# Altium PCB Monitor.PcbDoc
Units mil, origin at the board's own origin, x right, y up, seen from the top; angles counter-clockwise.
Board outline 5450.32 x 2733.06 mil, 2 copper layers (Top Layer, Bottom Layer); 12 components, 18 nets, 139 pads, 1 vias.
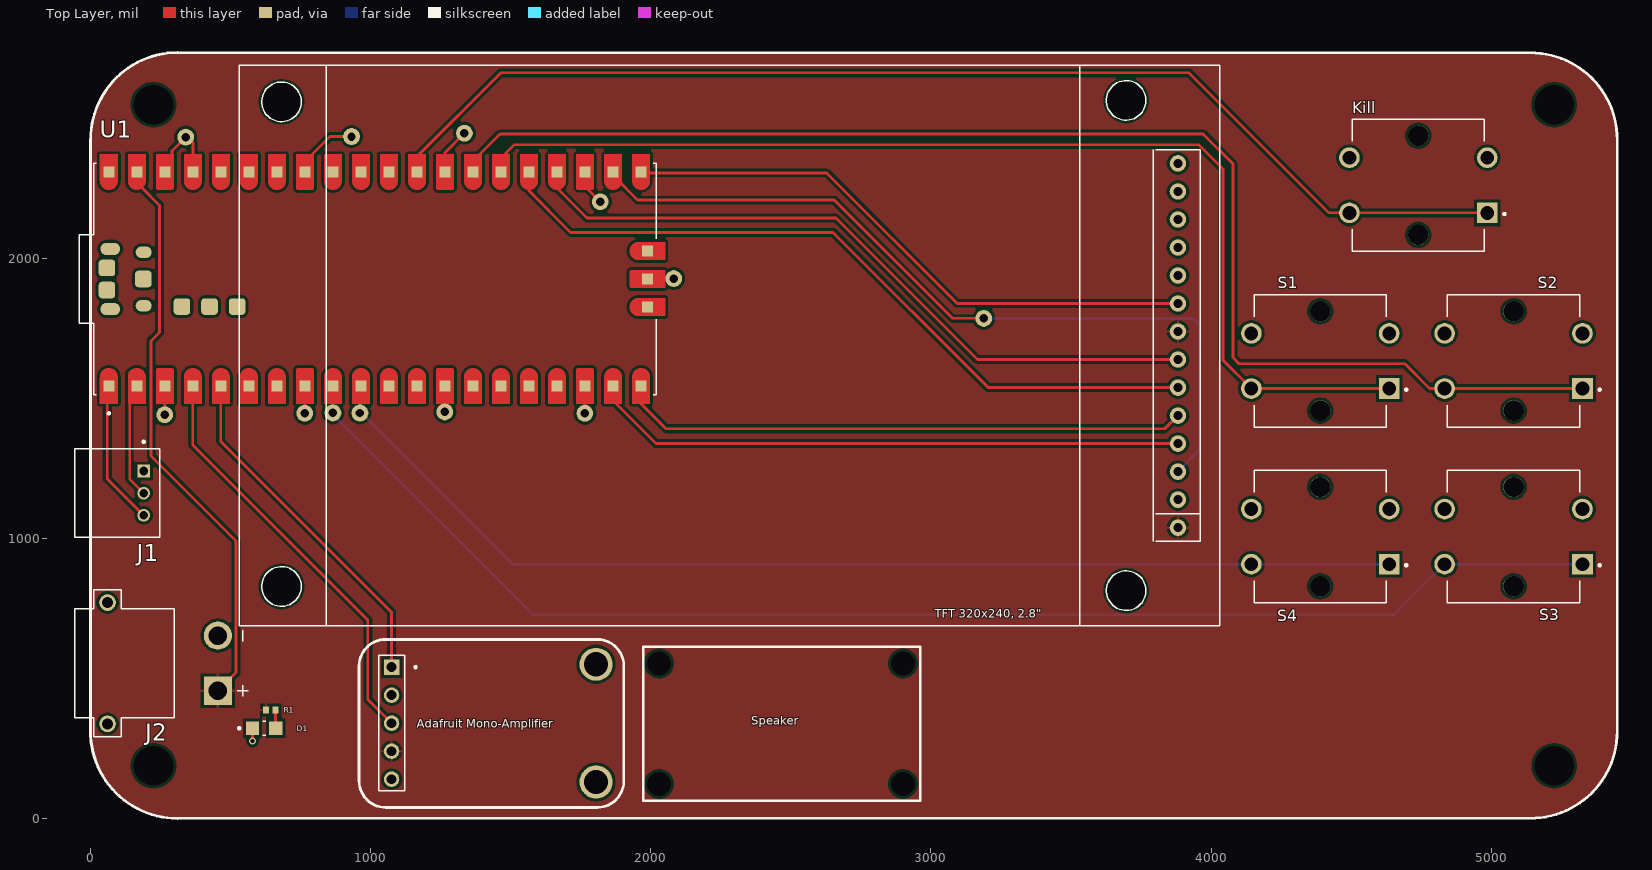
[diagram p0: Top Layer view]
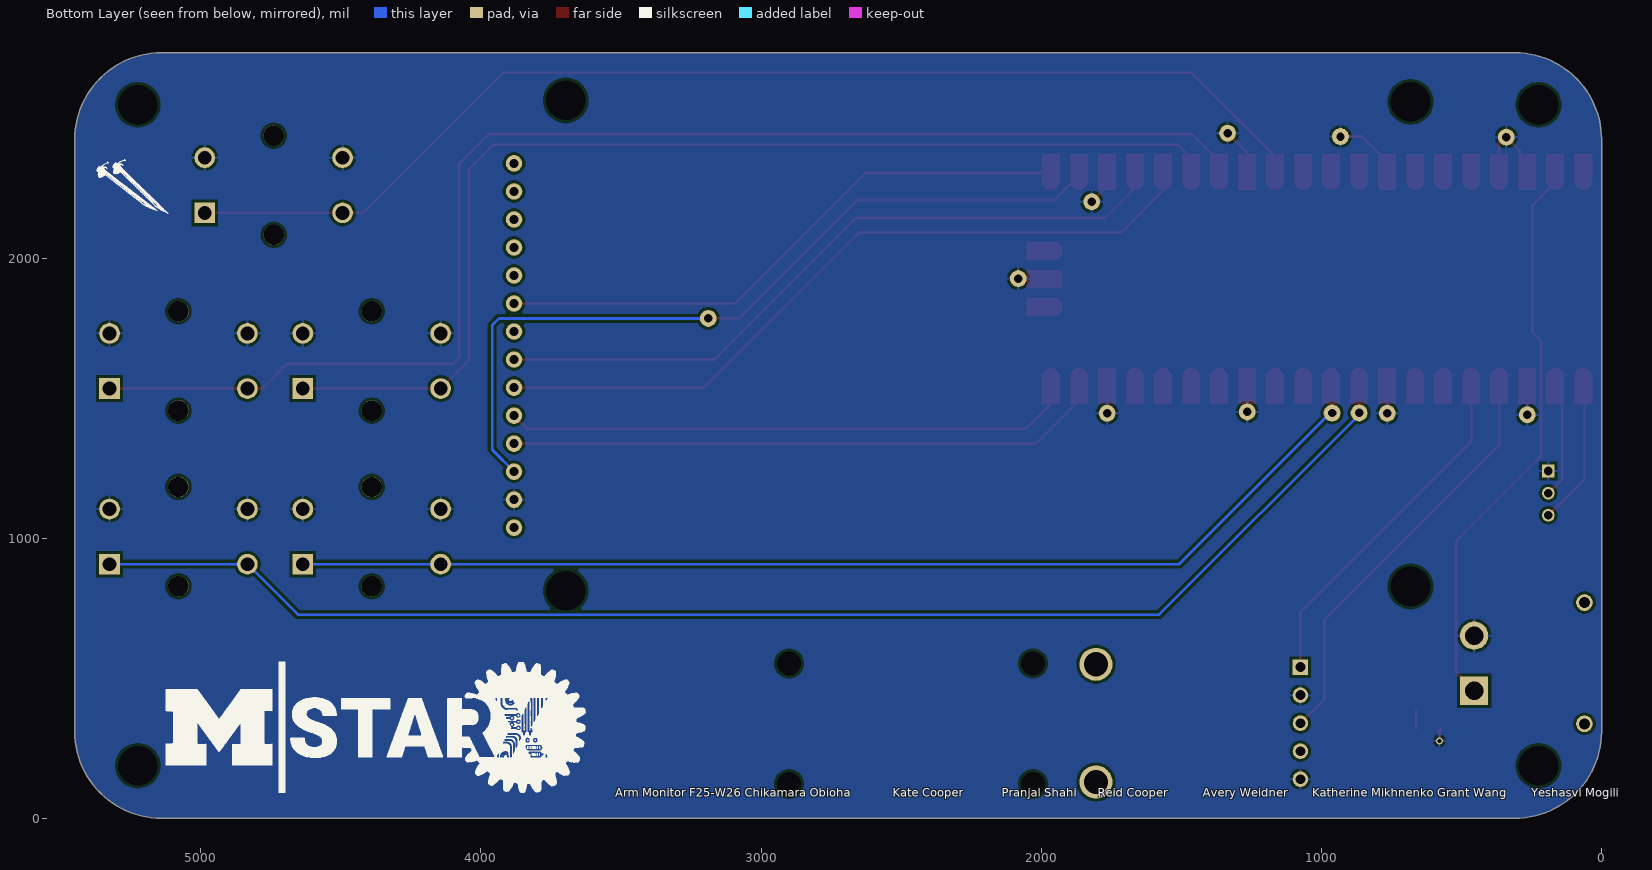
[diagram p1: Bottom Layer view, seen from below]

## Layer stack, top to bottom
Top Solder: solder mask 0.4, Solder Resist, Dk 3.5
Top Layer: signal copper 1.4
Dielectric 1: dielectric 12.6, FR-4, Dk 4.8
Bottom Layer: signal copper 1.4
Bottom Solder: solder mask 0.4, Solder Resist, Dk 3.5

## Board outline
0.16,312.26 0.16,2425 -0.16,2425 cw(c310,2425) 310,2735.16 5140,2735.16 cw(c5140,2425) 5450.16,2425 5450.16,308 5450.16,312.6 cw(c5140,312.6) 5140,2.44 5142,2.44 310.32,2.1 cw(c310.32,312.26)

## Design rules (kind name [scope] priority, off if disabled: settings)
Clearance [All] p1: gap=10 ignorepadtopadclearanceinfootprint=FALSE
PolygonConnect [All] p1: connectstyle=Relief reliefconductorwidth=10 reliefentries=4 polygonreliefangle="90 Angle" airgapwidth=10
RoutingVias [All] p1: holewidth=28 width=50 viastyle="Through Hole" minholewidth=28 minwidth=50 maxholewidth=28 maxwidth=50
SolderMaskExpansion [All] p1: expansion=4 istentingtop=FALSE
SupplyNets "Schematic Supply Nets_2" [InNet('3V3')] p1: voltage=0.000
SupplyNets "Schematic Supply Nets" [InNet('GND')] p2: voltage=0.000
Width [All] p1: maxlimit=10 minlimit=10 preferedwidth=10
30 further rules are at their usual default settings.

## Classes and differential pairs
component class Schematic: "Adafruit Mono-Amplifier" D1 J1 J2 Kill R1 S1 S2 S3 S4 U1

## Components (designator, comment, footprint, x,y, rotation, side; value= is the part's Value field where it differs from the comment)
* "TFT_320x240" TFT-320x240 3882,1690 r90 top
"Adafruit Mono-Amplifier" "5-146280-5" TE_5-146280-5 1075,342 r270 top (schematic designator J3)
D1 "LTST-C170GKT" LED_LTST-C170GKT 620,324 r0 top
J1 "440055-3" TE_440055-3 190,1242.02 r270 top
J2 "XT30PW-M" AMASS_XT30PW-M 61,556 r90 top
Kill "B3F-4055" SW_B3F-4055 4740,2262 r180 top (schematic designator S5)
R1 "150ohm" RESC1005X40N 644,389 r0 top
S1 "B3F-4055" SW_B3F-4055 4390,1635 r180 top
S2 "B3F-4055" SW_B3F-4055 5080,1635 r180 top
S3 "B3F-4055" SW_B3F-4055 5080,1008 r180 top
S4 "B3F-4055" SW_B3F-4055 4390,1008 r180 top
U1 "SC0915" MODULE_SC0915 1015.59,1927.53 r90 top

## Footprints (in the part's own frame and the unit in brackets; to place one, negate y for a bottom-side part, rotate by r counter-clockwise, add the part's x,y. Pads: shape width x height; smd on the part's side, far side on the other; paste and mask are expansions set on the pad)
AMASS_XT30PW-M [mm]
  round 2.55 hole 1.7: N(2.5,-10)
  rect 2.55x2.55 / inner round 2.55 / far side rect 2.55x2.55 hole 1.7: P(-2.5,-10)
  round 1.508 hole 1: S1(5.5,0) S2(-5.5,0)
  silkscreen extent -6.65,-12.75 6.65,2.95, body extent -6.65,-11 6.65,2.95, height 5
LED_LTST-C170GKT [mm]
  rect 1.2x1.2 smd paste+0 mask+0.102: 1(-1.05,0) 2(1.05,0)
  silkscreen extent -2.35,-0.63 0.13,0.63
MODULE_SC0915 [mm]
  rect 1x1 smd paste-1 mask+0: 1(-9.69,24.13) 2(-9.69,21.59) 3(-9.69,19.05) 4(-9.69,16.51) 5(-9.69,13.97) 6(-9.69,11.43) 7(-9.69,8.89) 8(-9.69,6.35) 9(-9.69,3.81) 10(-9.69,1.27) 11(-9.69,-1.27) 12(-9.69,-3.81) 13(-9.69,-6.35) 14(-9.69,-8.89) 15(-9.69,-11.43) 16(-9.69,-13.97) 17(-9.69,-16.51) 18(-9.69,-19.05) 19(-9.69,-21.59) 20(-9.69,-24.13) 21(9.69,-24.13) 22(9.69,-21.59) 23(9.69,-19.05) 24(9.69,-16.51) 25(9.69,-13.97) 26(9.69,-11.43) 27(9.69,-8.89) 28(9.69,-6.35) 29(9.69,-3.81) 30(9.69,-1.27) 31(9.69,1.27) 32(9.69,3.81) 33(9.69,6.35) 34(9.69,8.89) 35(9.69,11.43) 36(9.69,13.97) 37(9.69,16.51) 38(9.69,19.05) 39(9.69,21.59) 40(9.69,24.13) D1(-2.54,-24.7) D2(0,-24.7) D3(2.54,-24.7)
  oval 1.1x1.8 smd: A(-2.725,24) B(2.725,24)
  oval 1.05x1.45 smd: C(-2.425,20.97) D(2.425,20.97)
  rrect40% 1.5x1.5 smd: TP1(0,21) TP2(1,24.3) TP3(-1,24.3) TP4(-2.5,17.5) TP5(-2.5,15) TP6(-2.5,12.5)
  Top Layer region: -8.848,24.929 -8.806,24.926 -8.765,24.92 -8.724,24.913 -8.683,24.903 -8.643,24.891 -8.603,24.877 -8.565,24.861 -8.527,24.843 -8.49,24.823 -8.454,24.801 -8.42,24.777 -8.387,24.752 -8.355,24.725 -8.324,24.696 -8.295,24.665 -8.268,24.633 -8.243,24.6 -8.219,24.566 -8.197,24.53 -8.177,24.493 -8.159,24.455 -8.143,24.417 -8.129,24.377 -8.117,24.337 -8.107,24.296 -8.1,24.255 -8.094,24.214 -8.091,24.172 -8.09,24.13 -8.091,24.088 -8.094,24.046 -8.1,24.005 -8.107,23.964 -8.117,23.923 -8.129,23.883 -8.143,23.843 -8.159,23.805 -8.177,23.767 -8.197,23.73 -8.219,23.694 -8.243,23.66 -8.268,23.627 -8.295,23.595 -8.324,23.564 -8.355,23.535 -8.387,23.508 -8.42,23.483 -8.454,23.459 -8.49,23.437 -8.527,23.417 -8.565,23.399 -8.603,23.383 -8.643,23.369 -8.683,23.357 -8.724,23.347 -8.765,23.34 -8.806,23.334 -8.848,23.331 -8.89,23.33 -11.29,23.33 -11.29,24.93 -8.89,24.93
  Top Layer region: 2.582,-23.101 2.624,-23.104 2.665,-23.11 2.706,-23.117 2.747,-23.127 2.787,-23.139 2.827,-23.153 2.865,-23.169 2.903,-23.187 2.94,-23.207 2.976,-23.229 3.01,-23.253 3.043,-23.278 3.075,-23.305 3.106,-23.334 3.135,-23.365 3.162,-23.397 3.187,-23.43 3.211,-23.464 3.233,-23.5 3.253,-23.537 3.271,-23.575 3.287,-23.613 3.301,-23.653 3.313,-23.693 3.323,-23.734 3.33,-23.775 3.336,-23.816 3.339,-23.858 3.34,-23.9 3.34,-26.3 1.74,-26.3 1.74,-23.9 1.741,-23.858 1.744,-23.816 1.75,-23.775 1.757,-23.734 1.767,-23.693 1.779,-23.653 1.793,-23.613 1.809,-23.575 1.827,-23.537 1.847,-23.5 1.869,-23.464 1.893,-23.43 1.918,-23.397 1.945,-23.365 1.974,-23.334 2.005,-23.305 2.037,-23.278 2.07,-23.253 2.104,-23.229 2.14,-23.207 2.177,-23.187 2.215,-23.169 2.253,-23.153 2.293,-23.139 2.333,-23.127 2.374,-23.117 2.415,-23.11 2.456,-23.104 2.498,-23.101 2.54,-23.1
  Top Layer region: -2.498,-23.101 -2.456,-23.104 -2.415,-23.11 -2.374,-23.117 -2.333,-23.127 -2.293,-23.139 -2.253,-23.153 -2.215,-23.169 -2.177,-23.187 -2.14,-23.207 -2.104,-23.229 -2.07,-23.253 -2.037,-23.278 -2.005,-23.305 -1.974,-23.334 -1.945,-23.365 -1.918,-23.397 -1.893,-23.43 -1.869,-23.464 -1.847,-23.5 -1.827,-23.537 -1.809,-23.575 -1.793,-23.613 -1.779,-23.653 -1.767,-23.693 -1.757,-23.734 -1.75,-23.775 -1.744,-23.816 -1.741,-23.858 -1.74,-23.9 -1.74,-26.3 -3.34,-26.3 -3.34,-23.9 -3.339,-23.858 -3.336,-23.816 -3.33,-23.775 -3.323,-23.734 -3.313,-23.693 -3.301,-23.653 -3.287,-23.613 -3.271,-23.575 -3.253,-23.537 -3.233,-23.5 -3.211,-23.464 -3.187,-23.43 -3.162,-23.397 -3.135,-23.365 -3.106,-23.334 -3.075,-23.305 -3.043,-23.278 -3.01,-23.253 -2.976,-23.229 -2.94,-23.207 -2.903,-23.187 -2.865,-23.169 -2.827,-23.153 -2.787,-23.139 -2.747,-23.127 -2.706,-23.117 -2.665,-23.11 -2.624,-23.104 -2.582,-23.101 -2.54,-23.1
  Top Layer region: 11.29,-12.23 8.89,-12.23 8.848,-12.229 8.806,-12.226 8.765,-12.22 8.724,-12.213 8.683,-12.203 8.643,-12.191 8.603,-12.177 8.565,-12.161 8.527,-12.143 8.49,-12.123 8.454,-12.101 8.42,-12.077 8.387,-12.052 8.355,-12.025 8.324,-11.996 8.295,-11.965 8.268,-11.933 8.243,-11.9 8.219,-11.866 8.197,-11.83 8.177,-11.793 8.159,-11.755 8.143,-11.717 8.129,-11.677 8.117,-11.637 8.107,-11.596 8.1,-11.555 8.094,-11.514 8.091,-11.472 8.09,-11.43 8.091,-11.388 8.094,-11.346 8.1,-11.305 8.107,-11.264 8.117,-11.223 8.129,-11.183 8.143,-11.143 8.159,-11.105 8.177,-11.067 8.197,-11.03 8.219,-10.994 8.243,-10.96 8.268,-10.927 8.295,-10.895 8.324,-10.864 8.355,-10.835 8.387,-10.808 8.42,-10.783 8.454,-10.759 8.49,-10.737 8.527,-10.717 8.565,-10.699 8.603,-10.683 8.643,-10.669 8.683,-10.657 8.724,-10.647 8.765,-10.64 8.806,-10.634 8.848,-10.631 8.89,-10.63 11.29,-10.63
  Top Layer region: 11.29,-9.69 8.89,-9.69 8.848,-9.689 8.806,-9.686 8.765,-9.68 8.724,-9.673 8.683,-9.663 8.643,-9.651 8.603,-9.637 8.565,-9.621 8.527,-9.603 8.49,-9.583 8.454,-9.561 8.42,-9.537 8.387,-9.512 8.355,-9.485 8.324,-9.456 8.295,-9.425 8.268,-9.393 8.243,-9.36 8.219,-9.326 8.197,-9.29 8.177,-9.253 8.159,-9.215 8.143,-9.177 8.129,-9.137 8.117,-9.097 8.107,-9.056 8.1,-9.015 8.094,-8.974 8.091,-8.932 8.09,-8.89 8.091,-8.848 8.094,-8.806 8.1,-8.765 8.107,-8.724 8.117,-8.683 8.129,-8.643 8.143,-8.603 8.159,-8.565 8.177,-8.527 8.197,-8.49 8.219,-8.454 8.243,-8.42 8.268,-8.387 8.295,-8.355 8.324,-8.324 8.355,-8.295 8.387,-8.268 8.42,-8.243 8.454,-8.219 8.49,-8.197 8.527,-8.177 8.565,-8.159 8.603,-8.143 8.643,-8.129 8.683,-8.117 8.724,-8.107 8.765,-8.1 8.806,-8.094 8.848,-8.091 8.89,-8.09 11.29,-8.09
  Top Layer region: 11.29,0.47 8.89,0.47 8.848,0.471 8.806,0.474 8.765,0.48 8.724,0.487 8.683,0.497 8.643,0.509 8.603,0.523 8.565,0.539 8.527,0.557 8.49,0.577 8.454,0.599 8.42,0.623 8.387,0.648 8.355,0.675 8.324,0.704 8.295,0.735 8.268,0.767 8.243,0.8 8.219,0.834 8.197,0.87 8.177,0.907 8.159,0.945 8.143,0.983 8.129,1.023 8.117,1.063 8.107,1.104 8.1,1.145 8.094,1.186 8.091,1.228 8.09,1.27 8.091,1.312 8.094,1.354 8.1,1.395 8.107,1.436 8.117,1.477 8.129,1.517 8.143,1.557 8.159,1.595 8.177,1.633 8.197,1.67 8.219,1.706 8.243,1.74 8.268,1.773 8.295,1.805 8.324,1.836 8.355,1.865 8.387,1.892 8.42,1.917 8.454,1.941 8.49,1.963 8.527,1.983 8.565,2.001 8.603,2.017 8.643,2.031 8.683,2.043 8.724,2.053 8.765,2.06 8.806,2.066 8.848,2.069 8.89,2.07 11.29,2.07
  Top Layer region: 11.29,3.01 8.89,3.01 8.848,3.011 8.806,3.014 8.765,3.02 8.724,3.027 8.683,3.037 8.643,3.049 8.603,3.063 8.565,3.079 8.527,3.097 8.49,3.117 8.454,3.139 8.42,3.163 8.387,3.188 8.355,3.215 8.324,3.244 8.295,3.275 8.268,3.307 8.243,3.34 8.219,3.374 8.197,3.41 8.177,3.447 8.159,3.485 8.143,3.523 8.129,3.563 8.117,3.603 8.107,3.644 8.1,3.685 8.094,3.726 8.091,3.768 8.09,3.81 8.091,3.852 8.094,3.894 8.1,3.935 8.107,3.976 8.117,4.017 8.129,4.057 8.143,4.097 8.159,4.135 8.177,4.173 8.197,4.21 8.219,4.246 8.243,4.28 8.268,4.313 8.295,4.345 8.324,4.376 8.355,4.405 8.387,4.432 8.42,4.457 8.454,4.481 8.49,4.503 8.527,4.523 8.565,4.541 8.603,4.557 8.643,4.571 8.683,4.583 8.724,4.593 8.765,4.6 8.806,4.606 8.848,4.609 8.89,4.61 11.29,4.61
  Top Layer region: 11.29,8.09 8.89,8.09 8.848,8.091 8.806,8.094 8.765,8.1 8.724,8.107 8.683,8.117 8.643,8.129 8.603,8.143 8.565,8.159 8.527,8.177 8.49,8.197 8.454,8.219 8.42,8.243 8.387,8.268 8.355,8.295 8.324,8.324 8.295,8.355 8.268,8.387 8.243,8.42 8.219,8.454 8.197,8.49 8.177,8.527 8.159,8.565 8.143,8.603 8.129,8.643 8.117,8.683 8.107,8.724 8.1,8.765 8.094,8.806 8.091,8.848 8.09,8.89 8.091,8.932 8.094,8.974 8.1,9.015 8.107,9.056 8.117,9.097 8.129,9.137 8.143,9.177 8.159,9.215 8.177,9.253 8.197,9.29 8.219,9.326 8.243,9.36 8.268,9.393 8.295,9.425 8.324,9.456 8.355,9.485 8.387,9.512 8.42,9.537 8.454,9.561 8.49,9.583 8.527,9.603 8.565,9.621 8.603,9.637 8.643,9.651 8.683,9.663 8.724,9.673 8.765,9.68 8.806,9.686 8.848,9.689 8.89,9.69 11.29,9.69
  Top Layer region: 11.29,13.17 8.89,13.17 8.848,13.171 8.806,13.174 8.765,13.18 8.724,13.187 8.683,13.197 8.643,13.209 8.603,13.223 8.565,13.239 8.527,13.257 8.49,13.277 8.454,13.299 8.42,13.323 8.387,13.348 8.355,13.375 8.324,13.404 8.295,13.435 8.268,13.467 8.243,13.5 8.219,13.534 8.197,13.57 8.177,13.607 8.159,13.645 8.143,13.683 8.129,13.723 8.117,13.763 8.107,13.804 8.1,13.845 8.094,13.886 8.091,13.928 8.09,13.97 8.091,14.012 8.094,14.054 8.1,14.095 8.107,14.136 8.117,14.177 8.129,14.217 8.143,14.257 8.159,14.295 8.177,14.333 8.197,14.37 8.219,14.406 8.243,14.44 8.268,14.473 8.295,14.505 8.324,14.536 8.355,14.565 8.387,14.592 8.42,14.617 8.454,14.641 8.49,14.663 8.527,14.683 8.565,14.701 8.603,14.717 8.643,14.731 8.683,14.743 8.724,14.753 8.765,14.76 8.806,14.766 8.848,14.769 8.89,14.77 11.29,14.77
  Top Layer region: 11.29,23.33 8.89,23.33 8.848,23.331 8.806,23.334 8.765,23.34 8.724,23.347 8.683,23.357 8.643,23.369 8.603,23.383 8.565,23.399 8.527,23.417 8.49,23.437 8.454,23.459 8.42,23.483 8.387,23.508 8.355,23.535 8.324,23.564 8.295,23.595 8.268,23.627 8.243,23.66 8.219,23.694 8.197,23.73 8.177,23.767 8.159,23.805 8.143,23.843 8.129,23.883 8.117,23.923 8.107,23.964 8.1,24.005 8.094,24.046 8.091,24.088 8.09,24.13 8.091,24.172 8.094,24.214 8.1,24.255 8.107,24.296 8.117,24.337 8.129,24.377 8.143,24.417 8.159,24.455 8.177,24.493 8.197,24.53 8.219,24.566 8.243,24.6 8.268,24.633 8.295,24.665 8.324,24.696 8.355,24.725 8.387,24.752 8.42,24.777 8.454,24.801 8.49,24.823 8.527,24.843 8.565,24.861 8.603,24.877 8.643,24.891 8.683,24.903 8.724,24.913 8.765,24.92 8.806,24.926 8.848,24.929 8.89,24.93 11.29,24.93
  Top Layer region: 11.29,-4.61 8.89,-4.61 8.848,-4.609 8.806,-4.606 8.765,-4.6 8.724,-4.593 8.683,-4.583 8.643,-4.571 8.603,-4.557 8.565,-4.541 8.527,-4.523 8.49,-4.503 8.454,-4.481 8.42,-4.457 8.387,-4.432 8.355,-4.405 8.324,-4.376 8.295,-4.345 8.268,-4.313 8.243,-4.28 8.219,-4.246 8.197,-4.21 8.177,-4.173 8.159,-4.135 8.143,-4.097 8.129,-4.057 8.117,-4.017 8.107,-3.976 8.1,-3.935 8.094,-3.894 8.091,-3.852 8.09,-3.81 8.091,-3.768 8.094,-3.726 8.1,-3.685 8.107,-3.644 8.117,-3.603 8.129,-3.563 8.143,-3.523 8.159,-3.485 8.177,-3.447 8.197,-3.41 8.219,-3.374 8.243,-3.34 8.268,-3.307 8.295,-3.275 8.324,-3.244 8.355,-3.215 8.387,-3.188 8.42,-3.163 8.454,-3.139 8.49,-3.117 8.527,-3.097 8.565,-3.079 8.603,-3.063 8.643,-3.049 8.683,-3.037 8.724,-3.027 8.765,-3.02 8.806,-3.014 8.848,-3.011 8.89,-3.01 11.29,-3.01
  Top Layer region: 11.29,-2.07 8.89,-2.07 8.848,-2.069 8.806,-2.066 8.765,-2.06 8.724,-2.053 8.683,-2.043 8.643,-2.031 8.603,-2.017 8.565,-2.001 8.527,-1.983 8.49,-1.963 8.454,-1.941 8.42,-1.917 8.387,-1.892 8.355,-1.865 8.324,-1.836 8.295,-1.805 8.268,-1.773 8.243,-1.74 8.219,-1.706 8.197,-1.67 8.177,-1.633 8.159,-1.595 8.143,-1.557 8.129,-1.517 8.117,-1.477 8.107,-1.436 8.1,-1.395 8.094,-1.354 8.091,-1.312 8.09,-1.27 8.091,-1.228 8.094,-1.186 8.1,-1.145 8.107,-1.104 8.117,-1.063 8.129,-1.023 8.143,-0.983 8.159,-0.945 8.177,-0.907 8.197,-0.87 8.219,-0.834 8.243,-0.8 8.268,-0.767 8.295,-0.735 8.324,-0.704 8.355,-0.675 8.387,-0.648 8.42,-0.623 8.454,-0.599 8.49,-0.577 8.527,-0.557 8.565,-0.539 8.603,-0.523 8.643,-0.509 8.683,-0.497 8.724,-0.487 8.765,-0.48 8.806,-0.474 8.848,-0.471 8.89,-0.47 11.29,-0.47
  Top Layer region: 11.29,10.63 8.89,10.63 8.848,10.631 8.806,10.634 8.765,10.64 8.724,10.647 8.683,10.657 8.643,10.669 8.603,10.683 8.565,10.699 8.527,10.717 8.49,10.737 8.454,10.759 8.42,10.783 8.387,10.808 8.355,10.835 8.324,10.864 8.295,10.895 8.268,10.927 8.243,10.96 8.219,10.994 8.197,11.03 8.177,11.067 8.159,11.105 8.143,11.143 8.129,11.183 8.117,11.223 8.107,11.264 8.1,11.305 8.094,11.346 8.091,11.388 8.09,11.43 8.091,11.472 8.094,11.514 8.1,11.555 8.107,11.596 8.117,11.637 8.129,11.677 8.143,11.717 8.159,11.755 8.177,11.793 8.197,11.83 8.219,11.866 8.243,11.9 8.268,11.933 8.295,11.965 8.324,11.996 8.355,12.025 8.387,12.052 8.42,12.077 8.454,12.101 8.49,12.123 8.527,12.143 8.565,12.161 8.603,12.177 8.643,12.191 8.683,12.203 8.724,12.213 8.765,12.22 8.806,12.226 8.848,12.229 8.89,12.23 11.29,12.23
  Top Layer region: -8.848,9.689 -8.806,9.686 -8.765,9.68 -8.724,9.673 -8.683,9.663 -8.643,9.651 -8.603,9.637 -8.565,9.621 -8.527,9.603 -8.49,9.583 -8.454,9.561 -8.42,9.537 -8.387,9.512 -8.355,9.485 -8.324,9.456 -8.295,9.425 -8.268,9.393 -8.243,9.36 -8.219,9.326 -8.197,9.29 -8.177,9.253 -8.159,9.215 -8.143,9.177 -8.129,9.137 -8.117,9.097 -8.107,9.056 -8.1,9.015 -8.094,8.974 -8.091,8.932 -8.09,8.89 -8.091,8.848 -8.094,8.806 -8.1,8.765 -8.107,8.724 -8.117,8.683 -8.129,8.643 -8.143,8.603 -8.159,8.565 -8.177,8.527 -8.197,8.49 -8.219,8.454 -8.243,8.42 -8.268,8.387 -8.295,8.355 -8.324,8.324 -8.355,8.295 -8.387,8.268 -8.42,8.243 -8.454,8.219 -8.49,8.197 -8.527,8.177 -8.565,8.159 -8.603,8.143 -8.643,8.129 -8.683,8.117 -8.724,8.107 -8.765,8.1 -8.806,8.094 -8.848,8.091 -8.89,8.09 -11.29,8.09 -11.29,9.69 -8.89,9.69
  Top Layer region: -8.848,12.229 -8.806,12.226 -8.765,12.22 -8.724,12.213 -8.683,12.203 -8.643,12.191 -8.603,12.177 -8.565,12.161 -8.527,12.143 -8.49,12.123 -8.454,12.101 -8.42,12.077 -8.387,12.052 -8.355,12.025 -8.324,11.996 -8.295,11.965 -8.268,11.933 -8.243,11.9 -8.219,11.866 -8.197,11.83 -8.177,11.793 -8.159,11.755 -8.143,11.717 -8.129,11.677 -8.117,11.637 -8.107,11.596 -8.1,11.555 -8.094,11.514 -8.091,11.472 -8.09,11.43 -8.091,11.388 -8.094,11.346 -8.1,11.305 -8.107,11.264 -8.117,11.223 -8.129,11.183 -8.143,11.143 -8.159,11.105 -8.177,11.067 -8.197,11.03 -8.219,10.994 -8.243,10.96 -8.268,10.927 -8.295,10.895 -8.324,10.864 -8.355,10.835 -8.387,10.808 -8.42,10.783 -8.454,10.759 -8.49,10.737 -8.527,10.717 -8.565,10.699 -8.603,10.683 -8.643,10.669 -8.683,10.657 -8.724,10.647 -8.765,10.64 -8.806,10.634 -8.848,10.631 -8.89,10.63 -11.29,10.63 -11.29,12.23 -8.89,12.23
  Top Layer region: -8.848,14.769 -8.806,14.766 -8.765,14.76 -8.724,14.753 -8.683,14.743 -8.643,14.731 -8.603,14.717 -8.565,14.701 -8.527,14.683 -8.49,14.663 -8.454,14.641 -8.42,14.617 -8.387,14.592 -8.355,14.565 -8.324,14.536 -8.295,14.505 -8.268,14.473 -8.243,14.44 -8.219,14.406 -8.197,14.37 -8.177,14.333 -8.159,14.295 -8.143,14.257 -8.129,14.217 -8.117,14.177 -8.107,14.136 -8.1,14.095 -8.094,14.054 -8.091,14.012 -8.09,13.97 -8.091,13.928 -8.094,13.886 -8.1,13.845 -8.107,13.804 -8.117,13.763 -8.129,13.723 -8.143,13.683 -8.159,13.645 -8.177,13.607 -8.197,13.57 -8.219,13.534 -8.243,13.5 -8.268,13.467 -8.295,13.435 -8.324,13.404 -8.355,13.375 -8.387,13.348 -8.42,13.323 -8.454,13.299 -8.49,13.277 -8.527,13.257 -8.565,13.239 -8.603,13.223 -8.643,13.209 -8.683,13.197 -8.724,13.187 -8.765,13.18 -8.806,13.174 -8.848,13.171 -8.89,13.17 -11.29,13.17 -11.29,14.77 -8.89,14.77
  Top Layer region: -8.848,17.309 -8.806,17.306 -8.765,17.3 -8.724,17.293 -8.683,17.283 -8.643,17.271 -8.603,17.257 -8.565,17.241 -8.527,17.223 -8.49,17.203 -8.454,17.181 -8.42,17.157 -8.387,17.132 -8.355,17.105 -8.324,17.076 -8.295,17.045 -8.268,17.013 -8.243,16.98 -8.219,16.946 -8.197,16.91 -8.177,16.873 -8.159,16.835 -8.143,16.797 -8.129,16.757 -8.117,16.717 -8.107,16.676 -8.1,16.635 -8.094,16.594 -8.091,16.552 -8.09,16.51 -8.091,16.468 -8.094,16.426 -8.1,16.385 -8.107,16.344 -8.117,16.303 -8.129,16.263 -8.143,16.223 -8.159,16.185 -8.177,16.147 -8.197,16.11 -8.219,16.074 -8.243,16.04 -8.268,16.007 -8.295,15.975 -8.324,15.944 -8.355,15.915 -8.387,15.888 -8.42,15.863 -8.454,15.839 -8.49,15.817 -8.527,15.797 -8.565,15.779 -8.603,15.763 -8.643,15.749 -8.683,15.737 -8.724,15.727 -8.765,15.72 -8.806,15.714 -8.848,15.711 -8.89,15.71 -11.29,15.71 -11.29,17.31 -8.89,17.31
  Top Layer region: -8.848,22.389 -8.806,22.386 -8.765,22.38 -8.724,22.373 -8.683,22.363 -8.643,22.351 -8.603,22.337 -8.565,22.321 -8.527,22.303 -8.49,22.283 -8.454,22.261 -8.42,22.237 -8.387,22.212 -8.355,22.185 -8.324,22.156 -8.295,22.125 -8.268,22.093 -8.243,22.06 -8.219,22.026 -8.197,21.99 -8.177,21.953 -8.159,21.915 -8.143,21.877 -8.129,21.837 -8.117,21.797 -8.107,21.756 -8.1,21.715 -8.094,21.674 -8.091,21.632 -8.09,21.59 -8.091,21.548 -8.094,21.506 -8.1,21.465 -8.107,21.424 -8.117,21.383 -8.129,21.343 -8.143,21.303 -8.159,21.265 -8.177,21.227 -8.197,21.19 -8.219,21.154 -8.243,21.12 -8.268,21.087 -8.295,21.055 -8.324,21.024 -8.355,20.995 -8.387,20.968 -8.42,20.943 -8.454,20.919 -8.49,20.897 -8.527,20.877 -8.565,20.859 -8.603,20.843 -8.643,20.829 -8.683,20.817 -8.724,20.807 -8.765,20.8 -8.806,20.794 -8.848,20.791 -8.89,20.79 -11.29,20.79 -11.29,22.39 -8.89,22.39
  Top Layer region: -8.848,-15.711 -8.806,-15.714 -8.765,-15.72 -8.724,-15.727 -8.683,-15.737 -8.643,-15.749 -8.603,-15.763 -8.565,-15.779 -8.527,-15.797 -8.49,-15.817 -8.454,-15.839 -8.42,-15.863 -8.387,-15.888 -8.355,-15.915 -8.324,-15.944 -8.295,-15.975 -8.268,-16.007 -8.243,-16.04 -8.219,-16.074 -8.197,-16.11 -8.177,-16.147 -8.159,-16.185 -8.143,-16.223 -8.129,-16.263 -8.117,-16.303 -8.107,-16.344 -8.1,-16.385 -8.094,-16.426 -8.091,-16.468 -8.09,-16.51 -8.091,-16.552 -8.094,-16.594 -8.1,-16.635 -8.107,-16.676 -8.117,-16.717 -8.129,-16.757 -8.143,-16.797 -8.159,-16.835 -8.177,-16.873 -8.197,-16.91 -8.219,-16.946 -8.243,-16.98 -8.268,-17.013 -8.295,-17.045 -8.324,-17.076 -8.355,-17.105 -8.387,-17.132 -8.42,-17.157 -8.454,-17.181 -8.49,-17.203 -8.527,-17.223 -8.565,-17.241 -8.603,-17.257 -8.643,-17.271 -8.683,-17.283 -8.724,-17.293 -8.765,-17.3 -8.806,-17.306 -8.848,-17.309 -8.89,-17.31 -11.29,-17.31 -11.29,-15.71 -8.89,-15.71
  Top Layer region: -8.848,-13.171 -8.806,-13.174 -8.765,-13.18 -8.724,-13.187 -8.683,-13.197 -8.643,-13.209 -8.603,-13.223 -8.565,-13.239 -8.527,-13.257 -8.49,-13.277 -8.454,-13.299 -8.42,-13.323 -8.387,-13.348 -8.355,-13.375 -8.324,-13.404 -8.295,-13.435 -8.268,-13.467 -8.243,-13.5 -8.219,-13.534 -8.197,-13.57 -8.177,-13.607 -8.159,-13.645 -8.143,-13.683 -8.129,-13.723 -8.117,-13.763 -8.107,-13.804 -8.1,-13.845 -8.094,-13.886 -8.091,-13.928 -8.09,-13.97 -8.091,-14.012 -8.094,-14.054 -8.1,-14.095 -8.107,-14.136 -8.117,-14.177 -8.129,-14.217 -8.143,-14.257 -8.159,-14.295 -8.177,-14.333 -8.197,-14.37 -8.219,-14.406 -8.243,-14.44 -8.268,-14.473 -8.295,-14.505 -8.324,-14.536 -8.355,-14.565 -8.387,-14.592 -8.42,-14.617 -8.454,-14.641 -8.49,-14.663 -8.527,-14.683 -8.565,-14.701 -8.603,-14.717 -8.643,-14.731 -8.683,-14.743 -8.724,-14.753 -8.765,-14.76 -8.806,-14.766 -8.848,-14.769 -8.89,-14.77 -11.29,-14.77 -11.29,-13.17 -8.89,-13.17
  Top Layer region: -8.848,-10.631 -8.806,-10.634 -8.765,-10.64 -8.724,-10.647 -8.683,-10.657 -8.643,-10.669 -8.603,-10.683 -8.565,-10.699 -8.527,-10.717 -8.49,-10.737 -8.454,-10.759 -8.42,-10.783 -8.387,-10.808 -8.355,-10.835 -8.324,-10.864 -8.295,-10.895 -8.268,-10.927 -8.243,-10.96 -8.219,-10.994 -8.197,-11.03 -8.177,-11.067 -8.159,-11.105 -8.143,-11.143 -8.129,-11.183 -8.117,-11.223 -8.107,-11.264 -8.1,-11.305 -8.094,-11.346 -8.091,-11.388 -8.09,-11.43 -8.091,-11.472 -8.094,-11.514 -8.1,-11.555 -8.107,-11.596 -8.117,-11.637 -8.129,-11.677 -8.143,-11.717 -8.159,-11.755 -8.177,-11.793 -8.197,-11.83 -8.219,-11.866 -8.243,-11.9 -8.268,-11.933 -8.295,-11.965 -8.324,-11.996 -8.355,-12.025 -8.387,-12.052 -8.42,-12.077 -8.454,-12.101 -8.49,-12.123 -8.527,-12.143 -8.565,-12.161 -8.603,-12.177 -8.643,-12.191 -8.683,-12.203 -8.724,-12.213 -8.765,-12.22 -8.806,-12.226 -8.848,-12.229 -8.89,-12.23 -11.29,-12.23 -11.29,-10.63 -8.89,-10.63
  Top Layer region: -8.848,-8.091 -8.806,-8.094 -8.765,-8.1 -8.724,-8.107 -8.683,-8.117 -8.643,-8.129 -8.603,-8.143 -8.565,-8.159 -8.527,-8.177 -8.49,-8.197 -8.454,-8.219 -8.42,-8.243 -8.387,-8.268 -8.355,-8.295 -8.324,-8.324 -8.295,-8.355 -8.268,-8.387 -8.243,-8.42 -8.219,-8.454 -8.197,-8.49 -8.177,-8.527 -8.159,-8.565 -8.143,-8.603 -8.129,-8.643 -8.117,-8.683 -8.107,-8.724 -8.1,-8.765 -8.094,-8.806 -8.091,-8.848 -8.09,-8.89 -8.091,-8.932 -8.094,-8.974 -8.1,-9.015 -8.107,-9.056 -8.117,-9.097 -8.129,-9.137 -8.143,-9.177 -8.159,-9.215 -8.177,-9.253 -8.197,-9.29 -8.219,-9.326 -8.243,-9.36 -8.268,-9.393 -8.295,-9.425 -8.324,-9.456 -8.355,-9.485 -8.387,-9.512 -8.42,-9.537 -8.454,-9.561 -8.49,-9.583 -8.527,-9.603 -8.565,-9.621 -8.603,-9.637 -8.643,-9.651 -8.683,-9.663 -8.724,-9.673 -8.765,-9.68 -8.806,-9.686 -8.848,-9.689 -8.89,-9.69 -11.29,-9.69 -11.29,-8.09 -8.89,-8.09
  Top Layer region: -8.848,-3.011 -8.806,-3.014 -8.765,-3.02 -8.724,-3.027 -8.683,-3.037 -8.643,-3.049 -8.603,-3.063 -8.565,-3.079 -8.527,-3.097 -8.49,-3.117 -8.454,-3.139 -8.42,-3.163 -8.387,-3.188 -8.355,-3.215 -8.324,-3.244 -8.295,-3.275 -8.268,-3.307 -8.243,-3.34 -8.219,-3.374 -8.197,-3.41 -8.177,-3.447 -8.159,-3.485 -8.143,-3.523 -8.129,-3.563 -8.117,-3.603 -8.107,-3.644 -8.1,-3.685 -8.094,-3.726 -8.091,-3.768 -8.09,-3.81 -8.091,-3.852 -8.094,-3.894 -8.1,-3.935 -8.107,-3.976 -8.117,-4.017 -8.129,-4.057 -8.143,-4.097 -8.159,-4.135 -8.177,-4.173 -8.197,-4.21 -8.219,-4.246 -8.243,-4.28 -8.268,-4.313 -8.295,-4.345 -8.324,-4.376 -8.355,-4.405 -8.387,-4.432 -8.42,-4.457 -8.454,-4.481 -8.49,-4.503 -8.527,-4.523 -8.565,-4.541 -8.603,-4.557 -8.643,-4.571 -8.683,-4.583 -8.724,-4.593 -8.765,-4.6 -8.806,-4.606 -8.848,-4.609 -8.89,-4.61 -11.29,-4.61 -11.29,-3.01 -8.89,-3.01
  Top Layer region: -8.848,-0.471 -8.806,-0.474 -8.765,-0.48 -8.724,-0.487 -8.683,-0.497 -8.643,-0.509 -8.603,-0.523 -8.565,-0.539 -8.527,-0.557 -8.49,-0.577 -8.454,-0.599 -8.42,-0.623 -8.387,-0.648 -8.355,-0.675 -8.324,-0.704 -8.295,-0.735 -8.268,-0.767 -8.243,-0.8 -8.219,-0.834 -8.197,-0.87 -8.177,-0.907 -8.159,-0.945 -8.143,-0.983 -8.129,-1.023 -8.117,-1.063 -8.107,-1.104 -8.1,-1.145 -8.094,-1.186 -8.091,-1.228 -8.09,-1.27 -8.091,-1.312 -8.094,-1.354 -8.1,-1.395 -8.107,-1.436 -8.117,-1.477 -8.129,-1.517 -8.143,-1.557 -8.159,-1.595 -8.177,-1.633 -8.197,-1.67 -8.219,-1.706 -8.243,-1.74 -8.268,-1.773 -8.295,-1.805 -8.324,-1.836 -8.355,-1.865 -8.387,-1.892 -8.42,-1.917 -8.454,-1.941 -8.49,-1.963 -8.527,-1.983 -8.565,-2.001 -8.603,-2.017 -8.643,-2.031 -8.683,-2.043 -8.724,-2.053 -8.765,-2.06 -8.806,-2.066 -8.848,-2.069 -8.89,-2.07 -11.29,-2.07 -11.29,-0.47 -8.89,-0.47
  Top Layer region: -8.848,2.069 -8.806,2.066 -8.765,2.06 -8.724,2.053 -8.683,2.043 -8.643,2.031 -8.603,2.017 -8.565,2.001 -8.527,1.983 -8.49,1.963 -8.454,1.941 -8.42,1.917 -8.387,1.892 -8.355,1.865 -8.324,1.836 -8.295,1.805 -8.268,1.773 -8.243,1.74 -8.219,1.706 -8.197,1.67 -8.177,1.633 -8.159,1.595 -8.143,1.557 -8.129,1.517 -8.117,1.477 -8.107,1.436 -8.1,1.395 -8.094,1.354 -8.091,1.312 -8.09,1.27 -8.091,1.228 -8.094,1.186 -8.1,1.145 -8.107,1.104 -8.117,1.063 -8.129,1.023 -8.143,0.983 -8.159,0.945 -8.177,0.907 -8.197,0.87 -8.219,0.834 -8.243,0.8 -8.268,0.767 -8.295,0.735 -8.324,0.704 -8.355,0.675 -8.387,0.648 -8.42,0.623 -8.454,0.599 -8.49,0.577 -8.527,0.557 -8.565,0.539 -8.603,0.523 -8.643,0.509 -8.683,0.497 -8.724,0.487 -8.765,0.48 -8.806,0.474 -8.848,0.471 -8.89,0.47 -11.29,0.47 -11.29,2.07 -8.89,2.07
  Top Layer region: -8.848,4.609 -8.806,4.606 -8.765,4.6 -8.724,4.593 -8.683,4.583 -8.643,4.571 -8.603,4.557 -8.565,4.541 -8.527,4.523 -8.49,4.503 -8.454,4.481 -8.42,4.457 -8.387,4.432 -8.355,4.405 -8.324,4.376 -8.295,4.345 -8.268,4.313 -8.243,4.28 -8.219,4.246 -8.197,4.21 -8.177,4.173 -8.159,4.135 -8.143,4.097 -8.129,4.057 -8.117,4.017 -8.107,3.976 -8.1,3.935 -8.094,3.894 -8.091,3.852 -8.09,3.81 -8.091,3.768 -8.094,3.726 -8.1,3.685 -8.107,3.644 -8.117,3.603 -8.129,3.563 -8.143,3.523 -8.159,3.485 -8.177,3.447 -8.197,3.41 -8.219,3.374 -8.243,3.34 -8.268,3.307 -8.295,3.275 -8.324,3.244 -8.355,3.215 -8.387,3.188 -8.42,3.163 -8.454,3.139 -8.49,3.117 -8.527,3.097 -8.565,3.079 -8.603,3.063 -8.643,3.049 -8.683,3.037 -8.724,3.027 -8.765,3.02 -8.806,3.014 -8.848,3.011 -8.89,3.01 -11.29,3.01 -11.29,4.61 -8.89,4.61
  Top Layer region: -8.848,-20.791 -8.806,-20.794 -8.765,-20.8 -8.724,-20.807 -8.683,-20.817 -8.643,-20.829 -8.603,-20.843 -8.565,-20.859 -8.527,-20.877 -8.49,-20.897 -8.454,-20.919 -8.42,-20.943 -8.387,-20.968 -8.355,-20.995 -8.324,-21.024 -8.295,-21.055 -8.268,-21.087 -8.243,-21.12 -8.219,-21.154 -8.197,-21.19 -8.177,-21.227 -8.159,-21.265 -8.143,-21.303 -8.129,-21.343 -8.117,-21.383 -8.107,-21.424 -8.1,-21.465 -8.094,-21.506 -8.091,-21.548 -8.09,-21.59 -8.091,-21.632 -8.094,-21.674 -8.1,-21.715 -8.107,-21.756 -8.117,-21.797 -8.129,-21.837 -8.143,-21.877 -8.159,-21.915 -8.177,-21.953 -8.197,-21.99 -8.219,-22.026 -8.243,-22.06 -8.268,-22.093 -8.295,-22.125 -8.324,-22.156 -8.355,-22.185 -8.387,-22.212 -8.42,-22.237 -8.454,-22.261 -8.49,-22.283 -8.527,-22.303 -8.565,-22.321 -8.603,-22.337 -8.643,-22.351 -8.683,-22.363 -8.724,-22.373 -8.765,-22.38 -8.806,-22.386 -8.848,-22.389 -8.89,-22.39 -11.29,-22.39 -11.29,-20.79 -8.89,-20.79
  Top Layer region: 11.29,-17.31 8.89,-17.31 8.848,-17.309 8.806,-17.306 8.765,-17.3 8.724,-17.293 8.683,-17.283 8.643,-17.271 8.603,-17.257 8.565,-17.241 8.527,-17.223 8.49,-17.203 8.454,-17.181 8.42,-17.157 8.387,-17.132 8.355,-17.105 8.324,-17.076 8.295,-17.045 8.268,-17.013 8.243,-16.98 8.219,-16.946 8.197,-16.91 8.177,-16.873 8.159,-16.835 8.143,-16.797 8.129,-16.757 8.117,-16.717 8.107,-16.676 8.1,-16.635 8.094,-16.594 8.091,-16.552 8.09,-16.51 8.091,-16.468 8.094,-16.426 8.1,-16.385 8.107,-16.344 8.117,-16.303 8.129,-16.263 8.143,-16.223 8.159,-16.185 8.177,-16.147 8.197,-16.11 8.219,-16.074 8.243,-16.04 8.268,-16.007 8.295,-15.975 8.324,-15.944 8.355,-15.915 8.387,-15.888 8.42,-15.863 8.454,-15.839 8.49,-15.817 8.527,-15.797 8.565,-15.779 8.603,-15.763 8.643,-15.749 8.683,-15.737 8.724,-15.727 8.765,-15.72 8.806,-15.714 8.848,-15.711 8.89,-15.71 11.29,-15.71
  Top Layer region: 11.29,-22.39 8.89,-22.39 8.848,-22.389 8.806,-22.386 8.765,-22.38 8.724,-22.373 8.683,-22.363 8.643,-22.351 8.603,-22.337 8.565,-22.321 8.527,-22.303 8.49,-22.283 8.454,-22.261 8.42,-22.237 8.387,-22.212 8.355,-22.185 8.324,-22.156 8.295,-22.125 8.268,-22.093 8.243,-22.06 8.219,-22.026 8.197,-21.99 8.177,-21.953 8.159,-21.915 8.143,-21.877 8.129,-21.837 8.117,-21.797 8.107,-21.756 8.1,-21.715 8.094,-21.674 8.091,-21.632 8.09,-21.59 8.091,-21.548 8.094,-21.506 8.1,-21.465 8.107,-21.424 8.117,-21.383 8.129,-21.343 8.143,-21.303 8.159,-21.265 8.177,-21.227 8.197,-21.19 8.219,-21.154 8.243,-21.12 8.268,-21.087 8.295,-21.055 8.324,-21.024 8.355,-20.995 8.387,-20.968 8.42,-20.943 8.454,-20.919 8.49,-20.897 8.527,-20.877 8.565,-20.859 8.603,-20.843 8.643,-20.829 8.683,-20.817 8.724,-20.807 8.765,-20.8 8.806,-20.794 8.848,-20.791 8.89,-20.79 11.29,-20.79
  Top Layer region: 11.29,20.79 8.89,20.79 8.848,20.791 8.806,20.794 8.765,20.8 8.724,20.807 8.683,20.817 8.643,20.829 8.603,20.843 8.565,20.859 8.527,20.877 8.49,20.897 8.454,20.919 8.42,20.943 8.387,20.968 8.355,20.995 8.324,21.024 8.295,21.055 8.268,21.087 8.243,21.12 8.219,21.154 8.197,21.19 8.177,21.227 8.159,21.265 8.143,21.303 8.129,21.343 8.117,21.383 8.107,21.424 8.1,21.465 8.094,21.506 8.091,21.548 8.09,21.59 8.091,21.632 8.094,21.674 8.1,21.715 8.107,21.756 8.117,21.797 8.129,21.837 8.143,21.877 8.159,21.915 8.177,21.953 8.197,21.99 8.219,22.026 8.243,22.06 8.268,22.093 8.295,22.125 8.324,22.156 8.355,22.185 8.387,22.212 8.42,22.237 8.454,22.261 8.49,22.283 8.527,22.303 8.565,22.321 8.603,22.337 8.643,22.351 8.683,22.363 8.724,22.373 8.765,22.38 8.806,22.386 8.848,22.389 8.89,22.39 11.29,22.39
  Top Layer region: -8.848,-23.331 -8.806,-23.334 -8.765,-23.34 -8.724,-23.347 -8.683,-23.357 -8.643,-23.369 -8.603,-23.383 -8.565,-23.399 -8.527,-23.417 -8.49,-23.437 -8.454,-23.459 -8.42,-23.483 -8.387,-23.508 -8.355,-23.535 -8.324,-23.564 -8.295,-23.595 -8.268,-23.627 -8.243,-23.66 -8.219,-23.694 -8.197,-23.73 -8.177,-23.767 -8.159,-23.805 -8.143,-23.843 -8.129,-23.883 -8.117,-23.923 -8.107,-23.964 -8.1,-24.005 -8.094,-24.046 -8.091,-24.088 -8.09,-24.13 -8.091,-24.172 -8.094,-24.214 -8.1,-24.255 -8.107,-24.296 -8.117,-24.337 -8.129,-24.377 -8.143,-24.417 -8.159,-24.455 -8.177,-24.493 -8.197,-24.53 -8.219,-24.566 -8.243,-24.6 -8.268,-24.633 -8.295,-24.665 -8.324,-24.696 -8.355,-24.725 -8.387,-24.752 -8.42,-24.777 -8.454,-24.801 -8.49,-24.823 -8.527,-24.843 -8.565,-24.861 -8.603,-24.877 -8.643,-24.891 -8.683,-24.903 -8.724,-24.913 -8.765,-24.92 -8.806,-24.926 -8.848,-24.929 -8.89,-24.93 -11.29,-24.93 -11.29,-23.33 -8.89,-23.33
  Top Layer region: -8.269,7.149 -8.259,7.148 -8.248,7.146 -8.238,7.143 -8.228,7.14 -8.218,7.137 -8.209,7.133 -8.199,7.128 -8.19,7.123 -8.181,7.118 -8.172,7.112 -8.164,7.105 -8.156,7.099 -8.149,7.091 -8.141,7.084 -8.135,7.076 -8.128,7.068 -8.122,7.059 -8.117,7.05 -8.112,7.041 -8.107,7.031 -8.103,7.022 -8.1,7.012 -8.097,7.002 -8.094,6.992 -8.092,6.981 -8.091,6.971 -8.09,6.96 -8.09,6.95 -8.09,5.75 -8.09,5.74 -8.091,5.729 -8.092,5.719 -8.094,5.708 -8.097,5.698 -8.1,5.688 -8.103,5.678 -8.107,5.669 -8.112,5.659 -8.117,5.65 -8.122,5.641 -8.128,5.632 -8.135,5.624 -8.141,5.616 -8.149,5.609 -8.156,5.601 -8.164,5.595 -8.172,5.588 -8.181,5.582 -8.19,5.577 -8.199,5.572 -8.209,5.567 -8.218,5.563 -8.228,5.56 -8.238,5.557 -8.248,5.554 -8.259,5.552 -8.269,5.551 -8.28,5.55 -11.29,5.55 -11.29,7.15 -8.28,7.15
  Top Layer region: -8.269,19.849 -8.259,19.848 -8.248,19.846 -8.238,19.843 -8.228,19.84 -8.218,19.837 -8.209,19.833 -8.199,19.828 -8.19,19.823 -8.181,19.818 -8.172,19.812 -8.164,19.805 -8.156,19.799 -8.149,19.791 -8.141,19.784 -8.135,19.776 -8.128,19.768 -8.122,19.759 -8.117,19.75 -8.112,19.741 -8.107,19.731 -8.103,19.722 -8.1,19.712 -8.097,19.702 -8.094,19.692 -8.092,19.681 -8.091,19.671 -8.09,19.66 -8.09,19.65 -8.09,18.45 -8.09,18.44 -8.091,18.429 -8.092,18.419 -8.094,18.408 -8.097,18.398 -8.1,18.388 -8.103,18.378 -8.107,18.369 -8.112,18.359 -8.117,18.35 -8.122,18.341 -8.128,18.332 -8.135,18.324 -8.141,18.316 -8.149,18.309 -8.156,18.301 -8.164,18.295 -8.172,18.288 -8.181,18.282 -8.19,18.277 -8.199,18.272 -8.209,18.267 -8.218,18.263 -8.228,18.26 -8.238,18.257 -8.248,18.254 -8.259,18.252 -8.269,18.251 -8.28,18.25 -11.29,18.25 -11.29,19.85 -8.28,19.85
  Top Layer region: -8.269,-5.551 -8.259,-5.552 -8.248,-5.554 -8.238,-5.557 -8.228,-5.56 -8.218,-5.563 -8.209,-5.567 -8.199,-5.572 -8.19,-5.577 -8.181,-5.582 -8.172,-5.588 -8.164,-5.595 -8.156,-5.601 -8.149,-5.609 -8.141,-5.616 -8.135,-5.624 -8.128,-5.632 -8.122,-5.641 -8.117,-5.65 -8.112,-5.659 -8.107,-5.669 -8.103,-5.678 -8.1,-5.688 -8.097,-5.698 -8.094,-5.708 -8.092,-5.719 -8.091,-5.729 -8.09,-5.74 -8.09,-5.75 -8.09,-6.95 -8.09,-6.96 -8.091,-6.971 -8.092,-6.981 -8.094,-6.992 -8.097,-7.002 -8.1,-7.012 -8.103,-7.022 -8.107,-7.031 -8.112,-7.041 -8.117,-7.05 -8.122,-7.059 -8.128,-7.068 -8.135,-7.076 -8.141,-7.084 -8.149,-7.091 -8.156,-7.099 -8.164,-7.105 -8.172,-7.112 -8.181,-7.118 -8.19,-7.123 -8.199,-7.128 -8.209,-7.133 -8.218,-7.137 -8.228,-7.14 -8.238,-7.143 -8.248,-7.146 -8.259,-7.148 -8.269,-7.149 -8.28,-7.15 -11.29,-7.15 -11.29,-5.55 -8.28,-5.55
  Top Layer region: -8.269,-18.251 -8.259,-18.252 -8.248,-18.254 -8.238,-18.257 -8.228,-18.26 -8.218,-18.263 -8.209,-18.267 -8.199,-18.272 -8.19,-18.277 -8.181,-18.282 -8.172,-18.288 -8.164,-18.295 -8.156,-18.301 -8.149,-18.309 -8.141,-18.316 -8.135,-18.324 -8.128,-18.332 -8.122,-18.341 -8.117,-18.35 -8.112,-18.359 -8.107,-18.369 -8.103,-18.378 -8.1,-18.388 -8.097,-18.398 -8.094,-18.408 -8.092,-18.419 -8.091,-18.429 -8.09,-18.44 -8.09,-18.45 -8.09,-19.65 -8.09,-19.66 -8.091,-19.671 -8.092,-19.681 -8.094,-19.692 -8.097,-19.702 -8.1,-19.712 -8.103,-19.722 -8.107,-19.731 -8.112,-19.741 -8.117,-19.75 -8.122,-19.759 -8.128,-19.768 -8.135,-19.776 -8.141,-19.784 -8.149,-19.791 -8.156,-19.799 -8.164,-19.805 -8.172,-19.812 -8.181,-19.818 -8.19,-19.823 -8.199,-19.828 -8.209,-19.833 -8.218,-19.837 -8.228,-19.84 -8.238,-19.843 -8.248,-19.846 -8.259,-19.848 -8.269,-19.849 -8.28,-19.85 -11.29,-19.85 -11.29,-18.25 -8.28,-18.25
  Top Layer region: 11.29,15.71 8.89,15.71 8.848,15.711 8.806,15.714 8.765,15.72 8.724,15.727 8.683,15.737 8.643,15.749 8.603,15.763 8.565,15.779 8.527,15.797 8.49,15.817 8.454,15.839 8.42,15.863 8.387,15.888 8.355,15.915 8.324,15.944 8.295,15.975 8.268,16.007 8.243,16.04 8.219,16.074 8.197,16.11 8.177,16.147 8.159,16.185 8.143,16.223 8.129,16.263 8.117,16.303 8.107,16.344 8.1,16.385 8.094,16.426 8.091,16.468 8.09,16.51 8.091,16.552 8.094,16.594 8.1,16.635 8.107,16.676 8.117,16.717 8.129,16.757 8.143,16.797 8.159,16.835 8.177,16.873 8.197,16.91 8.219,16.946 8.243,16.98 8.268,17.013 8.295,17.045 8.324,17.076 8.355,17.105 8.387,17.132 8.42,17.157 8.454,17.181 8.49,17.203 8.527,17.223 8.565,17.241 8.603,17.257 8.643,17.271 8.683,17.283 8.724,17.293 8.765,17.3 8.806,17.306 8.848,17.309 8.89,17.31 11.29,17.31
  Top Layer region: 11.29,5.55 8.28,5.55 8.269,5.551 8.259,5.552 8.248,5.554 8.238,5.557 8.228,5.56 8.218,5.563 8.209,5.567 8.199,5.572 8.19,5.577 8.181,5.582 8.172,5.588 8.164,5.595 8.156,5.601 8.149,5.609 8.141,5.616 8.135,5.624 8.128,5.632 8.122,5.641 8.117,5.65 8.112,5.659 8.107,5.669 8.103,5.678 8.1,5.688 8.097,5.698 8.094,5.708 8.092,5.719 8.091,5.729 8.09,5.74 8.09,5.75 8.09,6.95 8.09,6.96 8.091,6.971 8.092,6.981 8.094,6.992 8.097,7.002 8.1,7.012 8.103,7.022 8.107,7.031 8.112,7.041 8.117,7.05 8.122,7.059 8.128,7.068 8.135,7.076 8.141,7.084 8.149,7.091 8.156,7.099 8.164,7.105 8.172,7.112 8.181,7.118 8.19,7.123 8.199,7.128 8.209,7.133 8.218,7.137 8.228,7.14 8.238,7.143 8.248,7.146 8.259,7.148 8.269,7.149 8.28,7.15 11.29,7.15
  Top Layer region: 11.29,-19.85 8.28,-19.85 8.269,-19.849 8.259,-19.848 8.248,-19.846 8.238,-19.843 8.228,-19.84 8.218,-19.837 8.209,-19.833 8.199,-19.828 8.19,-19.823 8.181,-19.818 8.172,-19.812 8.164,-19.805 8.156,-19.799 8.149,-19.791 8.141,-19.784 8.135,-19.776 8.128,-19.768 8.122,-19.759 8.117,-19.75 8.112,-19.741 8.107,-19.731 8.103,-19.722 8.1,-19.712 8.097,-19.702 8.094,-19.692 8.092,-19.681 8.091,-19.671 8.09,-19.66 8.09,-19.65 8.09,-18.45 8.09,-18.44 8.091,-18.429 8.092,-18.419 8.094,-18.408 8.097,-18.398 8.1,-18.388 8.103,-18.378 8.107,-18.369 8.112,-18.359 8.117,-18.35 8.122,-18.341 8.128,-18.332 8.135,-18.324 8.141,-18.316 8.149,-18.309 8.156,-18.301 8.164,-18.295 8.172,-18.288 8.181,-18.282 8.19,-18.277 8.199,-18.272 8.209,-18.267 8.218,-18.263 8.228,-18.26 8.238,-18.257 8.248,-18.254 8.259,-18.252 8.269,-18.251 8.28,-18.25 11.29,-18.25
  Top Layer region: 11.29,-7.15 8.28,-7.15 8.269,-7.149 8.259,-7.148 8.248,-7.146 8.238,-7.143 8.228,-7.14 8.218,-7.137 8.209,-7.133 8.199,-7.128 8.19,-7.123 8.181,-7.118 8.172,-7.112 8.164,-7.105 8.156,-7.099 8.149,-7.091 8.141,-7.084 8.135,-7.076 8.128,-7.068 8.122,-7.059 8.117,-7.05 8.112,-7.041 8.107,-7.031 8.103,-7.022 8.1,-7.012 8.097,-7.002 8.094,-6.992 8.092,-6.981 8.091,-6.971 8.09,-6.96 8.09,-6.95 8.09,-5.75 8.09,-5.74 8.091,-5.729 8.092,-5.719 8.094,-5.708 8.097,-5.698 8.1,-5.688 8.103,-5.678 8.107,-5.669 8.112,-5.659 8.117,-5.65 8.122,-5.641 8.128,-5.632 8.135,-5.624 8.141,-5.616 8.149,-5.609 8.156,-5.601 8.164,-5.595 8.172,-5.588 8.181,-5.582 8.19,-5.577 8.199,-5.572 8.209,-5.567 8.218,-5.563 8.228,-5.56 8.238,-5.557 8.248,-5.554 8.259,-5.552 8.269,-5.551 8.28,-5.55 11.29,-5.55
  Top Layer region: 11.29,18.25 8.28,18.25 8.269,18.251 8.259,18.252 8.248,18.254 8.238,18.257 8.228,18.26 8.218,18.263 8.209,18.267 8.199,18.272 8.19,18.277 8.181,18.282 8.172,18.288 8.164,18.295 8.156,18.301 8.149,18.309 8.141,18.316 8.135,18.324 8.128,18.332 8.122,18.341 8.117,18.35 8.112,18.359 8.107,18.369 8.103,18.378 8.1,18.388 8.097,18.398 8.094,18.408 8.092,18.419 8.091,18.429 8.09,18.44 8.09,18.45 8.09,19.65 8.09,19.66 8.091,19.671 8.092,19.681 8.094,19.692 8.097,19.702 8.1,19.712 8.103,19.722 8.107,19.731 8.112,19.741 8.117,19.75 8.122,19.759 8.128,19.768 8.135,19.776 8.141,19.784 8.149,19.791 8.156,19.799 8.164,19.805 8.172,19.812 8.181,19.818 8.19,19.823 8.199,19.828 8.209,19.833 8.218,19.837 8.228,19.84 8.238,19.843 8.248,19.846 8.259,19.848 8.269,19.849 8.28,19.85 11.29,19.85
  Top Layer region: 0.621,-23.101 0.631,-23.102 0.642,-23.104 0.652,-23.107 0.662,-23.11 0.672,-23.113 0.681,-23.117 0.691,-23.122 0.7,-23.127 0.709,-23.132 0.718,-23.138 0.726,-23.145 0.734,-23.151 0.741,-23.159 0.749,-23.166 0.755,-23.174 0.762,-23.182 0.768,-23.191 0.773,-23.2 0.778,-23.209 0.783,-23.219 0.787,-23.228 0.79,-23.238 0.793,-23.248 0.796,-23.258 0.798,-23.269 0.799,-23.279 0.8,-23.29 0.8,-23.3 0.8,-26.3 -0.8,-26.3 -0.8,-23.3 -0.8,-23.29 -0.799,-23.279 -0.798,-23.269 -0.796,-23.258 -0.793,-23.248 -0.79,-23.238 -0.787,-23.228 -0.783,-23.219 -0.778,-23.209 -0.773,-23.2 -0.768,-23.191 -0.762,-23.182 -0.755,-23.174 -0.749,-23.166 -0.741,-23.159 -0.734,-23.151 -0.726,-23.145 -0.718,-23.138 -0.709,-23.132 -0.7,-23.127 -0.691,-23.122 -0.681,-23.117 -0.672,-23.113 -0.662,-23.11 -0.652,-23.107 -0.642,-23.104 -0.631,-23.102 -0.621,-23.101 -0.61,-23.1 0.61,-23.1
  Top Layer region: 11.29,-14.77 8.89,-14.77 8.848,-14.769 8.806,-14.766 8.765,-14.76 8.724,-14.753 8.683,-14.743 8.643,-14.731 8.603,-14.717 8.565,-14.701 8.527,-14.683 8.49,-14.663 8.454,-14.641 8.42,-14.617 8.387,-14.592 8.355,-14.565 8.324,-14.536 8.295,-14.505 8.268,-14.473 8.243,-14.44 8.219,-14.406 8.197,-14.37 8.177,-14.333 8.159,-14.295 8.143,-14.257 8.129,-14.217 8.117,-14.177 8.107,-14.136 8.1,-14.095 8.094,-14.054 8.091,-14.012 8.09,-13.97 8.091,-13.928 8.094,-13.886 8.1,-13.845 8.107,-13.804 8.117,-13.763 8.129,-13.723 8.143,-13.683 8.159,-13.645 8.177,-13.607 8.197,-13.57 8.219,-13.534 8.243,-13.5 8.268,-13.467 8.295,-13.435 8.324,-13.404 8.355,-13.375 8.387,-13.348 8.42,-13.323 8.454,-13.299 8.49,-13.277 8.527,-13.257 8.565,-13.239 8.603,-13.223 8.643,-13.209 8.683,-13.197 8.724,-13.187 8.765,-13.18 8.806,-13.174 8.848,-13.171 8.89,-13.17 11.29,-13.17
  Top Layer region: 11.29,-24.93 8.89,-24.93 8.848,-24.929 8.806,-24.926 8.765,-24.92 8.724,-24.913 8.683,-24.903 8.643,-24.891 8.603,-24.877 8.565,-24.861 8.527,-24.843 8.49,-24.823 8.454,-24.801 8.42,-24.777 8.387,-24.752 8.355,-24.725 8.324,-24.696 8.295,-24.665 8.268,-24.633 8.243,-24.6 8.219,-24.566 8.197,-24.53 8.177,-24.493 8.159,-24.455 8.143,-24.417 8.129,-24.377 8.117,-24.337 8.107,-24.296 8.1,-24.255 8.094,-24.214 8.091,-24.172 8.09,-24.13 8.091,-24.088 8.094,-24.046 8.1,-24.005 8.107,-23.964 8.117,-23.923 8.129,-23.883 8.143,-23.843 8.159,-23.805 8.177,-23.767 8.197,-23.73 8.219,-23.694 8.243,-23.66 8.268,-23.627 8.295,-23.595 8.324,-23.564 8.355,-23.535 8.387,-23.508 8.42,-23.483 8.454,-23.459 8.49,-23.437 8.527,-23.417 8.565,-23.399 8.603,-23.383 8.643,-23.369 8.683,-23.357 8.724,-23.347 8.765,-23.34 8.806,-23.334 8.848,-23.331 8.89,-23.33 11.29,-23.33
  silkscreen extent -12.29,-25.5 10.5,26.8, body extent -10.5,-25.5 10.5,26.8, height 3.73
RESC1005X40N [mm]
  rect 0.54x0.6 smd paste+0 mask+0.102: 1(-0.432,0) 2(0.432,0)
  body extent -0.5,-0.25 0.5,0.25, height 0.4
SW_B3F-4055 [mm]
  rect 1.875x1.875 hole 1.25: 1(-6.25,2.5)
  round 1.875 hole 1.25: 2(6.25,2.5) 3(-6.25,-2.5) 4(6.25,-2.5)
  round 1.85 hole 1.85 unplated: ""(0,4.5) ""(0,-4.5)
  silkscreen extent -7.9,-6 6,6
TE_5-146280-5 [mm]
  rect 1.398x1.398 / inner round 1.398 / far side rect 1.398x1.398 hole 0.89: 1(-5.08,0)
  round 1.398 hole 0.89: 2(-2.54,0) 3(0,0) 4(2.54,0) 5(5.08,0)
  silkscreen extent -6.15,-1.17 6.15,2.27
TE_440055-3 [mm]
  rect 1.15x1.15 hole 0.8: 1(0,0)
  round 1.15 hole 0.8: 2(2.007,0) 3(4.013,0)
  silkscreen extent -2.75,-6.25 6.01,1.45
TFT-320x240 [mm]
  rrect100% 1.5x1.5 hole 0.8: 1(-16.51,0) 2(-13.97,0) 3(-11.43,0) 4(-8.89,0) 5(-6.35,0) 6(-3.81,0) 7(-1.27,0) 8(1.27,0) 9(3.81,0) 10(6.35,0) 11(8.89,0) 12(11.43,0) 13(13.97,0) 14(16.51,0)
  round 1.524 hole 3.592 unplated: 2(-22.225,4.699) 2(-21.844,81.28) 2(22.098,81.28) 2(22.225,4.699)
  silkscreen extent -25.4,-3.81 25.4,85.09

## Part data
"Adafruit Mono-Amplifier": "05 MODII HDR SRST B/A .100CL", Package=None, Availability=Unavailable, MP=5-146280-5, Price=None
D1: "Green 569nm LED Indication - Discrete 2.1V 0805 (2012 Metric)", Package="0805 Lite-On Inc.", Check_prices=https://www.snapeda.com/parts/LTST-C170GKT/Lite-On/view-part/?ref=eda, MF="Lite-On Inc.", MP=LTST-C170GKT, SnapEDA_Link=https://www.snapeda.com/parts/LTST-C170GKT/Lite-On/view-part/?ref=snap
J1: "Connector Header Through Hole, Right Angle 3 position 0.079 _2.00mm_", Package=None, Digi-Key_Part_Number=A100044-ND, DigiKey-Purchase-URL=https://snapeda.com/shop?store=DigiKey&id=2374828, EU_RoHS_Compliance=Compliant, MF="TE Connectivity", MP=440055-3, SnapEDA_Link=https://www.snapeda.com/parts/440055-3/TE%20Connectivity%20AMP%20Connectors/view-part/2374828/?ref=snap
J2: "Socket; DC supply; XT30; male; PIN: 2; on PCBs; THT; Colour: yellow", Package=None, Check_prices=https://www.snapeda.com/parts/XT30PW-M/AMASS/view-part/?ref=eda, MF=AMASS, MP=XT30PW-M, SnapEDA_Link=https://www.snapeda.com/parts/XT30PW-M/AMASS/view-part/?ref=snap
Kill S1 S2 S3 S4: Package=None, Availability=Unavailable, MP=B3F-4055, Price=None
R1: library part RC0402FR-07150RL, "150 Ohms Â±1% 0.063W, 1/16W Chip Resistor 0402 (1005 Metric) Moisture Resistant Thick Film", Package="1005 Panasonic Electronic Components", Check_prices=https://www.snapeda.com/parts/RC0402FR-07150RL/Yageo/view-part/?ref=eda, MF=Yageo, MP=RC0402FR-07150RL, SnapEDA_Link=https://www.snapeda.com/parts/RC0402FR-07150RL/Yageo/view-part/?ref=snap
U1: "RP2040 Raspberry Pi Pico series ARMÂ® CortexÂ®-M0+ MCU 32-Bit Embedded Evaluation Board", Package=None, Availability="In Stock", Check_prices=https://www.snapeda.com/parts/SC0915/Raspberry+Pi/view-part/?ref=eda, MF="Raspberry Pi", MP=SC0915, Price=None, Purchase-URL=https://pricing.snapeda.com/search/part/SC0915/?ref=eda, SnapEDA_Link=https://www.snapeda.com/parts/SC0915/Raspberry+Pi/view-part/?ref=snap

## Free pads (board coordinates)
  round 118.11 hole 86.61: 4(1805,132) 4(1805,552)
  round 60 hole 30: 5(265,1443) 6(340,2434) 7(932,2436) 8(1335,2448) 9(1820,2203) 10(765,1448) 11(865.59,1449.41) 11(962,1449) 11(1265,1453) 12(1765,1448) 13(2082,1929) 13(3188.67,1786.8)
  round 80 hole 85 unplated: 14(2030,125) 14(2030,555) 14(2900,125) 14(2900,555)
  round 60 hole 141.42: ""(225,190) ""(225,2550) ""(5225.16,190) ""(5225.16,2550)

## Via types
v1: diameter 25, hole 14, Top Layer to Bottom Layer, 1 vias

## Nets (pads, with @x,y where several pads share a name; then routed paths per layer and width w, separated by ;. In a path a pad name is that pad's centre, name@x,y a point inside that pad or via, vN(x,y) a via of type N, cw(c..) or ccw(c..) an arc to the next point about the centre after c; other vN are vias at no path point)
3V3: "Adafruit Mono-Amplifier.4" *.1 *.8 J2.P R1.1 U1.39 | length 2050.8
  Top Layer w10: U1.39 165.59,2271.7 184.74,2252.55 246.83,2190.46 246.83,1737 216,1706.17 216,1295.51 519.9,991.62 519.9,522.77 J2.P
A+: "Adafruit Mono-Amplifier.1" U1.5 | length 1292.4
  Top Layer w10: 447.66,1585.34 U1.5@480,1553 ; U1.5@465,1536 465,1348.01 1075,738.01 1075,542
CS: *.3 pad.13@3188.67,1786.8 U1.22 | length 2890.7
  Top Layer w10: 1865,2332.5 1878.04,2319.45 U1.22@1878.04,2304.96 ; 1875,2288 1953,2210 2655,2210 3077.83,1787.17 3188.3,1787.17 pad.13@3188.67,1786.8
  Bottom Layer w10: pad.13@3188.67,1786.8 3936.2,1786.8 3960,1763 3960,1318 *.3
DC: *.5 U1.20 | length 2053.5
  Top Layer w10: 1965,1569.5 U1.20@1977.03,1557.47 ; U1.20 1965.59,1482.41 2055,1393 3835,1393 *.5
GND: "Adafruit Mono-Amplifier.2" "Adafruit Mono-Amplifier.5" *.2@3882,1140 D1.1 J1.1 J2.N Kill.3 Kill.4 pad.5 pad.6 pad.7 pad.8 pad.9 pad.10 pad.11@1265,1453 pad.12 pad.13@2082,1929 S1.3 S1.4 S2.3 S2.4 S3.3 S3.4 S4.3 S4.4 U1.3 U1.8 U1.13 U1.18 U1.23 U1.28 U1.33 U1.37 U1.38 U1.D2 | length 1433.1
  Top Layer w10: 265,1569.5 pad.5 pad.5@266,1457 ; 265,2332.5 273.19,2347.18 ; 291,2335.37 291,2385 pad.6 340,2440.54 365.59,2414.95 U1.37 ; D1.1 578.66,279.34 v1(579,279) ; pad.10 765,1569.5 ; U1.33 778.03,2321.47 778.03,2359.03 855,2436 pad.7 ; pad.11@1265,1453 1265,1569.5 ; 1265,2332.5 1265,2378 pad.8 ; pad.12 1765,1569.5 ; U1.23@1765,2293 1765,2332.5 ; 1776.5,2268.47 1776.5,2246.5 pad.9 ; U1.D2 2002.72,1928.17 2075.34,1931.35 2075.55,1931.35 2079.44,1931.35 pad.13@2082,1929
MISO: *.9 U1.21 | length 2097.7
  Top Layer w10: U1.21@1977.33,2306 2628,2306 3094,1840 *.9
MOSI: *.6 U1.25 | length 2674
  Top Layer w10: U1.25 1565.59,2242.41 1714,2094 2651,2094 3205,1540 *.6
NetD1_2: D1.2 R1.2 | length 65.1
  Top Layer w10: R1.2 661.01,324.33 D1.2
RST: *.4 U1.19 | length 2215.4
  Top Layer w10: 1865,1569.5 1872.99,1561.51 1872.99,1542.01 1872.99,1490.01 ; U1.19 1865.59,1493.41 2019,1340 *.4
RX: J1.2 U1.2 | length 479
  Top Layer w10: 140,1541 U1.2@160,1561 ; 140,1593 140,1213 J1.2
SCK: *.7 U1.24 | length 2526.8
  Top Layer w10: U1.24 1671.32,2303.3 1671.32,2246.56 1772.88,2145 2661,2145 3166,1640 *.7
SD: "Adafruit Mono-Amplifier.3" U1.4 | length 1486.1
  Top Layer w10: U1.4@365,1534 365,1335.5 990,710.5 990,427 1075,342
SW1: S1.1 S1.2 U1.26 | length 3958.8
  Top Layer w10: 1460,2353 1514,2407 3956,2407 4043,2320 4043,1637.51 S1.2 S1.1
SW2: S2.1 S2.2 U1.27 | length 4771.7
  Top Layer w10: 1380,2353 1380,2363 1462,2445 3972,2445 4078,2339 4078,1647 4100,1625 4692.12,1625 4780.54,1536.57 S2.2 S2.1
SW3: pad.11@865.59,1449.41 S3.1 S3.2 U1.9 | length 4969.8
  Top Layer w10: 865,1569.5 877.44,1557.06 U1.9@877.44,1541.36 ; pad.11@865.59,1449.41 U1.9
  Bottom Layer w10: pad.11@859.25,1449.75 1579.71,729.29 4653.65,729.29 S3.2 S3.1
SW4: pad.11@962,1449 S4.1 S4.2 U1.10 | length 3995.8
  Top Layer w10: pad.11@962,1449 964,1544.44 U1.10
  Bottom Layer w10: pad.11@963.35,1453.65 1507.43,909.57 S4.2 S4.1
SW5: Kill.1 Kill.2 U1.29 | length 4183.6
  Top Layer w10: 1165,2332.5 1165,2363.99 1464.51,2663.5 3921.06,2663.5 4420.82,2163.74 4493.94,2163.74 Kill.1@4986.06,2163.74
TX: J1.3 U1.1 | length 515.9
  Top Layer w10: U1.1@60,1546.03 60,1214.02 J1.3
pads on no net: *.2@682,830 *.2@682,2560 *.2@3697,815 *.2@3697,2565 *.10 *.11 *.12 *.13 *.14 J2.S1 J2.S2 Kill. S1. S2. S3. S4. U1.6 U1.7 U1.11 U1.12 U1.14 U1.15 U1.16 U1.17 U1.30 U1.31 U1.32 U1.34 U1.35 U1.36 U1.40 U1.A U1.B U1.C U1.D U1.D1 U1.D3 U1.TP1 U1.TP2 U1.TP3 U1.TP4 U1.TP5 U1.TP6

## Polygon pours and split planes (outlines as drawn)
3V3 on Top Layer "3V3_L01_P000" (solid, pour order 0): 0.16,312.26 0.16,2425 -0.16,2425 cw(c310,2425) 310,2735.16 5140,2735.16 cw(c5140,2425) 5450.16,2425 5450.16,308 5450.16,312.6 cw(c5140,312.6) 5140,2.44 5142,2.44 310.32,2.1 cw(c310.32,312.26)
GND on Bottom Layer "GND_L02_P001" (solid, pour order 1): 0.16,312.26 0.16,2425 -0.16,2425 cw(c310,2425) 310,2735.16 5140,2735.16 cw(c5140,2425) 5450.16,2425 5450.16,308 5450.16,312.6 cw(c5140,312.6) 5140,2.44 5142,2.44 310.32,2.1 cw(c310.32,312.26)

## Silkscreen, mask and mechanical layers (free items; w line width, h text height)
Top Overlay:
  lines w10: 0.16,2425 0.16,312.26 ccw(c310.32,312.26) 310.32,2.1 5142,2.44 ; 0.84,2425.84 cw(c311,2425.84) 311,2736 ; 310,2735.16 5140,2735.16 cw(c5140,2425) 5450.16,2425 5450.16,308 ; 2960,615 1973,615 1973,65 2945,65 2959,65 2962,65 2962,615 ; 5140,2.44 ccw(c5140,312.6) 5450.16,312.6 ; 959,136 ccw(c1054,136) 1054,41 1809,41 ccw(c1809,136) 1904,136 1904,546 ccw(c1809,546) 1809,641 1054,641 ccw(c1054,546) 959,546 959,136
  text "Speaker" at 2358,336 h30
Bottom Overlay:
  drawing of 44 lines, arcs and shapes, not listed
  text "Arm Monitor F25-W26 Chikamara Obioha            Kate Cooper           Pranjal Shahi      Reid Cooper          Avery Weidner       Katherine Mikhnenko Grant Wang       Yeshasvi Mogili        Hadi Rihan" at 3520,80 h30

## Text inside footprints (layer, text, board x,y; h text height)
*: Top Overlay "TFT 320x240, 2.8\"" at 3013,718 h30